# Allegro board NISIPEANU_ALEXANDRU_P1_N15.brd
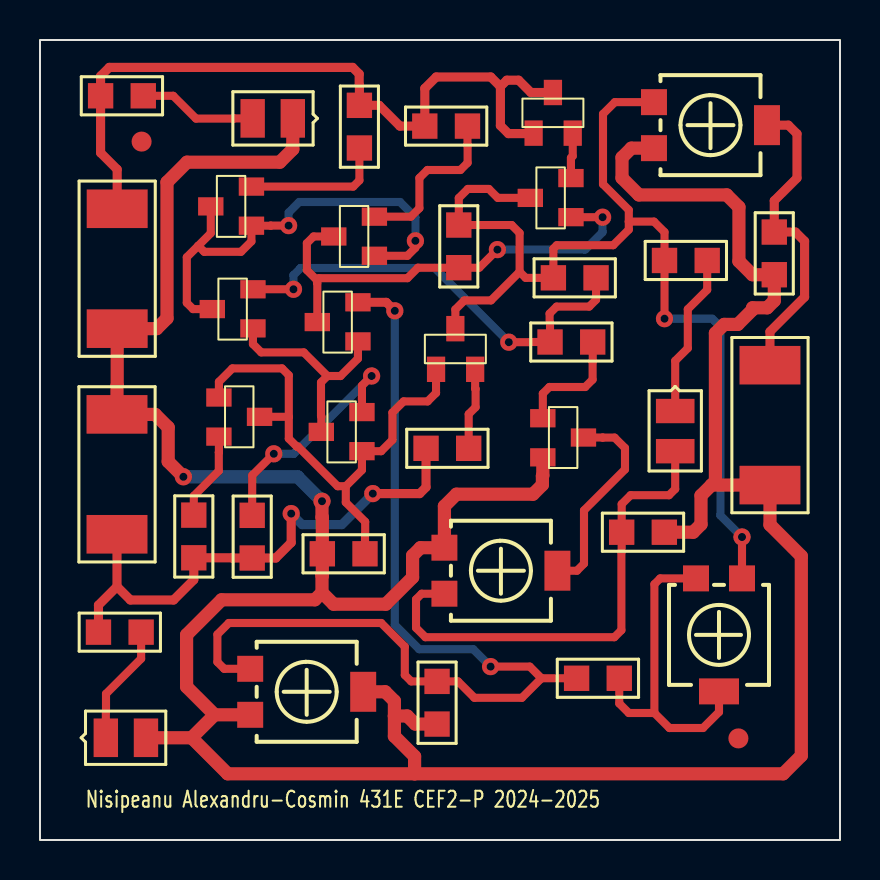
[diagram p0: board, top side]
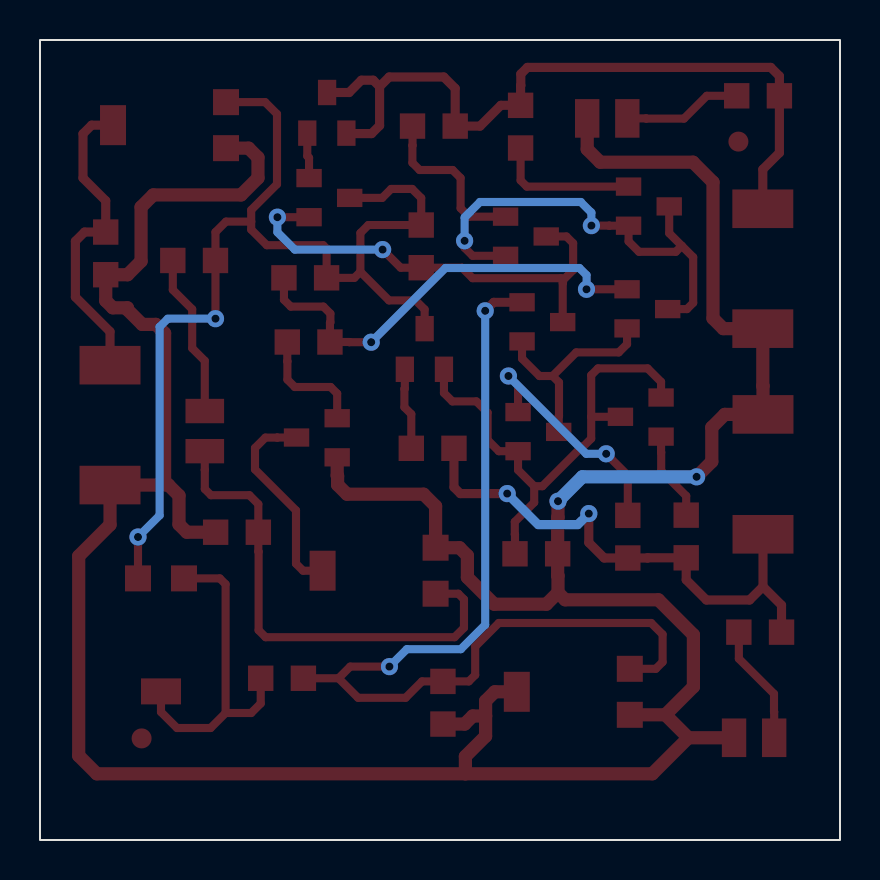
[diagram p1: board, bottom side, seen from below]

Outline 40 x 40 mm; copper layers: TOP, BOTTOM. Coordinates in mm from the lower left corner of the outline.
Outline path: rectangle 0,0 40,40

## Design rules (mm)
nets with their own width: min track width 0.406; nets IN+ N250834 N250958 N250986 N250992 N251024 N251092 N251120 N251224 N251350 N251422 N251592 N251636 N251708 N251882 N251922 N251928 N252066 N252112 N2518321
nets with their own width: min track width 0.457; nets VCC VOUT VSS
nets with their own width: min track width 0.66; nets GND

## Placement (name value [footprint] x y rotation side)
C1  470p  [SMC0805]  20.94 30.75 270 top
C2  2.2n  [SMC0805]  19.85 5.8 90 top
C4  470n  [SMC0805]  31.22 15.39 180 top
C5  2.2n  [SMC0805]  26.83 8.09 0 top
D3  1N4148  [SMD0805]  31.76 21.45 270 top
D8  5V,SMD2012B,LED  [SMD080512]  12.64 36.08 180 top
D9  5V,SMD2012B,LED  [SMD080512]  3.29 5.11 0 top
J1  CON2  [SMR2512]  3.86 25.57 90 top
J2  CON2  [SMR2512]  36.5 17.75 90 top
J3  CON2  [SMR2512]  3.85 21.28 270 top
NOREF  -  [unnamed]  34.92 5.08 0 top
NOREF#2  -  [unnamed]  5.08 34.92 0 top
P1  500k  [TS53YL]  20.22 12.31 180 top
P2  10k  [TS53YL]  10.51 6.26 180 top
P3  10k  [TS53YL]  32.8 13.08 90 top
Q1  QBC817-25  [TO236]  15.77 24.93 0 top
Q2  QBC817-25  [TO236]  10.52 25.58 0 top
Q3  QBC856B  [TO236]  10.44 30.71 0 top
Q4  QBC856B  [TO236]  16.59 29.21 0 top
Q5  QBC846B  [TO236]  9.07 22.12 180 top
Q6  QBC846B  [TO236]  15.97 19.44 0 top
Q7  BC807-25  [TO236]  26.42 31.14 0 top
Q8  BC817-25  [TO236]  19.8 23.66 270 top
Q9  BC817-25  [TO236]  24.68 35.47 270 top
R1  100  [SMR0805]  15.97 34.6 90 top
R2  100  [SMR0805]  21.37 35.7 180 top
R3  51  [SMR0805]  7.69 14.11 90 top
R4  51  [SMR0805]  10.61 14.1 90 top
R5  5.6k  [SMR0805]  16.25 14.31 180 top
R6  22k  [SMR0805]  25.67 28.11 0 top
R7  10k  [SMR0805]  25.5 24.9 0 top
R8  22  [SMR0805]  19.3 19.58 0 top
R9  5.6k  [SMR0805]  31.23 28.98 0 top
R22  15k  [SMR0805]  36.71 30.4 270 top
R26  10k  [TS53YL]  30.7 34.59 180 top
R32  820  [SMR0805]  3.03 37.21 0 top
R35  820  [SMR0805]  2.92 10.39 0 top
T7  JMMBFJ309LT1  [TO236]  25.27 21.09 180 top

## Library data of the parts
C1 C2 C4 C5 = C
D3 = 1N4148_0
D8 D9 = LED_0
J1-J3 = CON2
P1-P3 R26 = POT_0
Q1 Q2 = QBC817-25
Q3 Q4 = QBC856B_1
Q5 Q6 = QBC846B_3
Q7 = BC807-25_0
Q8 Q9 = BC817-25_1
R1-R9 R22 R32 R35 = R
T7 = JMMBFJ309LT1_1

## Footprints (pads in the part's own frame, mm; a bottom-side part is the same pattern mirrored in y, then rotated)
SMC0805
  rect 1.27x1.27 smd: 1(0,0) 2(2.134,0)
SMD0805
  rect 1.219x1.93 smd: A(2.007,0) C(0,0)
SMD080512
  rect 1.219x1.93 smd: 1(0,0) 2(2.007,0)
SMR0805
  rect 1.27x1.27 smd: 1(0,0) 2(2.134,0)
SMR2512
  rect 1.93x3.048 smd: 1(0,0) 2(5.994,0)
TO236
  rect 1.27x0.914 smd: 1(0.127,0) 2(0.127,1.956) 3(-1.905,0.965)
TS53YL
  rect 1.3x1.3 smd: 1(0,0) 3(0,-2.3)
  rect 1.3x2 smd: 2(-5.65,-1.15)
unnamed
  round 1 smd: (0,0)

## Nets
GND: C2.1 C4.1 D8.1 D9.2 J1.1 J2.1 J3.1 P1.3 P2.1 P2.2(T) R5.2 R22.2 R26.1 T7.2(S)
VCC: J1.2 Q9.1 Q9.3 R1.2 R2.2 R32.1
VSS: J3.2 R3.1 R4.1 R8.1 R35.1
IN+: C2.2 C5.1 P2.3 Q1.2
VOUT: J2.2 R22.1 R26.2(T)
N250834: D8.2 R32.2
N250958: Q7.2(E) Q9.2(E)
N250986: Q3.2(E) R1.1
N250992: Q4.2(E) R2.1
N251024: C1.2 Q1.3 Q4.3 Q7.1
N251092: Q2.3 Q3.1 Q3.3 Q4.1
N251120: C1.1 P3.3 Q7.3 Q8.3 R6.1 R9.1 R26.3
N251224: C5.2 P3.1 P3.2(T)
N251350: Q2.2 R6.2 R7.1
N251422: Q1.1(E) Q2.1(E) Q6.3
N251592: D3.C(CAT) R9.2
N251636: Q5.1 Q5.3 Q6.1 Q8.1 R5.1
N251708: R7.2 T7.1
N251882: C4.2 D3.A P1.1
N251922: Q5.2(E) R3.2
N251928: Q8.2(E) R8.2
N252066: P1.2(T) T7.3
N252112: D9.1 R35.2
N2518321: Q6.2(E) R4.2

## Via types
v1: diameter 0.864, hole 0.4, TOP to BOTTOM, 16 vias

## Routing (per net, layer and track width the routed paths; a pad name or vN(x,y) marks a point on that pad's centre or on a via; arc(x,y) is an arc through that point)
GND: length 162.5
  TOP w0.66: 7.58,5.11 D9.2 ; 7.58,5.11 8.73,6.26 ; 7.58,5.11 9.38,3.31 18.73,3.31 ; 14.1,12.37 14.68,11.79 17.29,11.79 18.63,13.13 18.63,14.22 19.02,14.61 P1.3 20.22,16.69 20.82,17.29 24.65,17.29 25.12,17.76 25.12,18.2 25.14,18.22 T7.2 ; 14.1,12.37 14.1,13.21 14.12,13.22 R5.2 14.12,16.12 14.1,16.14 v1(14.1,16.94) ; 14.1,12.37 13.74,12.01 9.08,12.01 7.33,10.26 7.33,7.66 8.73,6.26 ; 8.73,6.26 P2.1 ; 18.73,3.31 37.16,3.31 38.06,4.21 38.06,14.19 36.5,15.76 J2.1 33.57,17.75 ; 18.73,3.31 18.73,4.18 17.72,5.19 17.72,6.2 ; 33.57,17.75 33.77,17.94 33.77,25.34 34.21,25.78 34.89,25.78 35.63,26.52 35.63,26.61 36.36,26.61 36.71,26.96 R22.2 35.62,28.26 34.95,28.94 34.95,31.64 34.34,32.25 29.95,32.25 29.1,33.1 29.1,34.13 29.57,34.59 R26.1 ; 33.57,17.75 33.05,17.22 33.05,15.78 32.66,15.39 C4.1 ; v1(7.17,18.16) 6.41,18.92 6.41,20.63 5.76,21.28 J3.1 3.85,22.7 3.86,22.71 J1.1 5.84,25.57 6.35,26.08 6.35,32.89 7.35,33.89 11.99,33.89 12.64,34.54 D8.1 ; 17.72,6.2 17.72,6.95 17.26,7.41 P2.2 ; 17.72,6.2 18.36,6.2 18.77,5.8 C2.1
  BOTTOM w0.66: v1(7.17,18.16) 12.88,18.16 v1(14.1,16.94)
VCC: length 38.4
  TOP w0.457: 23.02,37.67 23.34,37.99 23.93,37.99 24.55,37.38 Q9.3 ; 23.02,37.67 22.54,38.15 19.81,38.15 19.24,37.58 R2.2 18,35.7 16.96,36.73 R1.2 15.97,37.72 15.96,37.73 15.96,38.3 15.63,38.63 3.46,38.63 3.03,38.2 R32.1 3.03,34.36 3.86,33.53 J1.2 ; 23.02,37.67 23.02,35.72 23.42,35.32 24.66,35.32 Q9.1
VSS: length 27.2
  TOP w0.457: 3.85,12.67 J3.2 ; 3.85,12.67 4.52,12 6.68,12 7.69,13.01 R3.1 9.61,14.11 9.62,14.1 R4.1 11.79,14.1 12.56,14.87 v1(12.56,16.32) ; 3.85,12.67 2.92,11.74 R35.1 ; R8.1 19.3,17.64 18.98,17.32 v1(16.64,17.32)
  BOTTOM w0.457: v1(12.56,16.32) 13.11,15.77 15.09,15.77 v1(16.64,17.32)
IN+: length 50.3
  TOP w0.406: v1(22.53,8.67) 24.49,8.67 25.07,8.09 ; 25.07,8.09 24.1,7.11 21.72,7.11 20.9,7.93 C2.2 18.56,7.93 18.24,8.25 18.24,9.67 17.06,10.85 9.44,10.85 8.87,10.28 8.87,8.9 9.21,8.56 P2.3 ; 25.07,8.09 C5.1
  TOP w0.45: Q1.2 17.31,26.89 v1(17.74,26.46)
  BOTTOM w0.406: v1(17.74,26.46) 17.74,10.76 18.96,9.54 21.66,9.54 v1(22.53,8.67)
VOUT: length 15.7
  TOP w0.457: R26.2 37.42,35.74 37.85,35.31 37.85,33.1 36.71,31.96 R22.1 37.77,30.4 38.23,29.94 38.23,27.15 36.5,25.42 J2.2
N250834: length 5.9
  TOP w0.406: D8.2 9.7,36.08 9.69,36.07 7.8,36.07 6.66,37.21 R32.2
N250958: length 2.3
  TOP w0.406: Q7.2 26.55,34.11 26.64,34.2 Q9.2
N250986: length 7.1
  TOP w0.406: Q3.2 15.66,32.67 15.97,32.98 R1.1
N250992: length 8.5
  TOP w0.406: Q4.2 18.55,31.17 18.97,31.59 18.97,33.1 19.37,33.5 21.02,33.5 21.38,33.86 21.38,34.73 21.37,34.73 R2.1
N251024: length 23.3
  TOP w0.406: v1(28.13,31.14) Q7.1 ; 13.85,27.99 13.85,27.86 13.87,27.84 Q1.3 ; 13.85,27.99 13.95,28.09 18.37,28.09 18.9,28.61 C1.2 21.96,28.61 v1(22.87,29.52) ; 13.85,27.99 13.34,28.5 13.34,29.84 13.68,30.18 Q4.3
  BOTTOM w0.406: v1(22.87,29.52) 27.26,29.52 28.13,30.39 v1(28.13,31.14)
N251092: length 23.6
  TOP w0.406: Q2.3 7.65,26.55 7.34,26.86 7.34,29.14 7.91,29.71 ; Q3.3 8.54,30.34 7.91,29.71 ; Q4.1 18.37,29.21 18.77,29.61 v1(18.77,29.96) ; v1(12.43,30.72) 11.54,30.72 11.53,30.71 Q3.1 10.57,29.93 10.05,29.41 8.21,29.41 7.91,29.71
  BOTTOM w0.406: v1(12.43,30.72) 12.43,31.37 12.96,31.9 18,31.9 18.77,31.13 v1(18.77,29.96)
N251120: length 54.3
  TOP w0.406: R26.3 28.74,36.89 28.15,36.3 28.15,32.79 29.44,31.5 29.44,30.92 ; Q8.3 20.77,26.53 21.22,26.98 22.55,26.98 23.98,28.41 ; 29.44,30.92 30.7,30.92 31.23,30.39 R9.1 v1(31.23,26.07) ; 29.44,30.92 29.44,30.52 28.66,29.74 25.84,29.74 25.67,29.57 R6.1 24.28,28.11 23.98,28.41 ; 23.98,28.41 23.98,30.35 23.58,30.75 C1.1 20.94,32.1 21.39,32.55 22.44,32.55 22.89,32.11 Q7.3 ; v1(35.1,15.15) P3.3
  BOTTOM w0.406: v1(35.1,15.15) 34.02,16.23 34.02,25.66 33.61,26.07 v1(31.23,26.07)
N251224: length 16.8
  TOP w0.406: P3.2 33.95,6.4 33.15,5.6 31.47,5.6 30.72,6.35 ; 30.72,6.35 30.72,12.79 31.01,13.08 P3.1 ; 30.72,6.35 29.44,6.35 28.96,6.83 C5.2
N251350: length 22.4
  TOP w0.406: v1(23.44,24.89) 24.53,24.89 24.54,24.9 R7.1 25.5,25.86 25.48,25.88 25.48,26.32 25.83,26.67 27.46,26.67 27.8,27.01 R6.2 ; Q2.2 v1(12.67,27.54)
  BOTTOM w0.406: v1(23.44,24.89) 19.73,28.6 13.03,28.6 12.67,28.24 v1(12.67,27.54)
N251422: length 10.8
  TOP w0.406: 14.37,23.2 15.03,23.2 15.9,24.07 Q1.1 ; 14.37,23.2 14.05,22.88 14.05,21.2 14.06,21.19 14.06,20.41 ; 14.37,23.2 13.19,24.38 11.06,24.38 10.65,24.8 Q2.1
N251592: length 8.2
  TOP w0.406: R9.2 33.36,27.51 32.39,26.54 32.39,24.59 31.76,23.96 D3.C
N251636: length 25.9
  TOP w0.406: Q5.1 8.95,22.91 9.62,23.58 12.1,23.58 12.44,23.24 12.44,21.16 ; 15.29,17.69 16.1,18.5 Q6.1 17.06,19.44 17.62,20 17.62,21.37 18.18,21.93 19.38,21.93 19.8,22.35 Q8.1 ; 15.29,17.69 14.88,17.69 12.9,19.67 12.84,19.67 12.44,20.07 12.44,21.16 ; 15.29,17.69 15.29,16.88 16.26,15.91 16.26,15.28 16.25,15.27 R5.1 ; 12.44,21.16 10.98,21.16 Q5.3
N251708: length 5.9
  TOP w0.406: R7.2 27.64,23.94 27.63,23.93 27.63,23.02 27.26,22.65 25.47,22.65 25.14,22.32 T7.1
N251882: length 24.8
  TOP w0.406: D3.A 31.76,18.5 31.76,17.55 31.45,17.24 29.53,17.24 29.08,16.79 C4.2 29.08,14.43 29.07,14.41 29.07,10.49 28.72,10.14 19.27,10.14 18.8,10.61 18.8,12.03 19.08,12.31 P1.1
N251922: length 4.4
  TOP w0.406: R3.2 7.69,17.21 8.94,18.46 8.94,19.38 8.95,19.38 Q5.2
N251928: length 4.1
  TOP w0.406: Q8.2 21.76,22.57 21.78,22.55 21.78,21.64 21.43,21.3 R8.2
N252066: length 10.4
  TOP w0.406: T7.3 28.14,20.12 28.14,20.12 28.73,20.12 29.25,19.6 29.25,18.53 27.2,16.48 27.2,13.82 26.85,13.46 P1.2
N252112: length 6
  TOP w0.406: D9.1 3.29,6.4 3.3,6.41 3.3,7.31 5.06,9.07 R35.2
N2518321: length 12
  TOP w0.406: v1(16.58,23.2) 16.1,22.72 Q6.2 ; R4.2 10.61,18.23 v1(11.69,19.31)
  BOTTOM w0.406: v1(16.58,23.2) 12.69,19.31 v1(11.69,19.31)

## Text on the board
Ref Des/Silkscreen Top: Nisipeanu Alexandru-Cosmin 431E CEF2-P 2024-2025
XSECTION_CHART: *  SURFACE | L1 TOP CONDUCTOR | *  DIELECTRIC | L2 BOTTOM CONDUCTOR | DESIGN CROSS SECTION CHART | ___________________________ | TOTAL THICKNESS 1.6 MM | 1-2
NCLEGEND-1-2: FIGURE | FINISHED_SIZE | 0.4 | DRILL CHART: TOP to BOTTOM | ALL UNITS ARE IN MILLIMETERS | PLATED | QTY | 16
